# Altium PCB P00160.5_868_P.PcbDoc
Units mm, origin at the board's own origin, x right, y up, seen from the top; angles counter-clockwise.
Board outline 67 x 20.5 mm, 4 copper layers (Top Layer, MID1, MID2, Bottom Layer), stack 0.982 mm thick; 71 components, 48 nets, 315 pads, 246 vias.
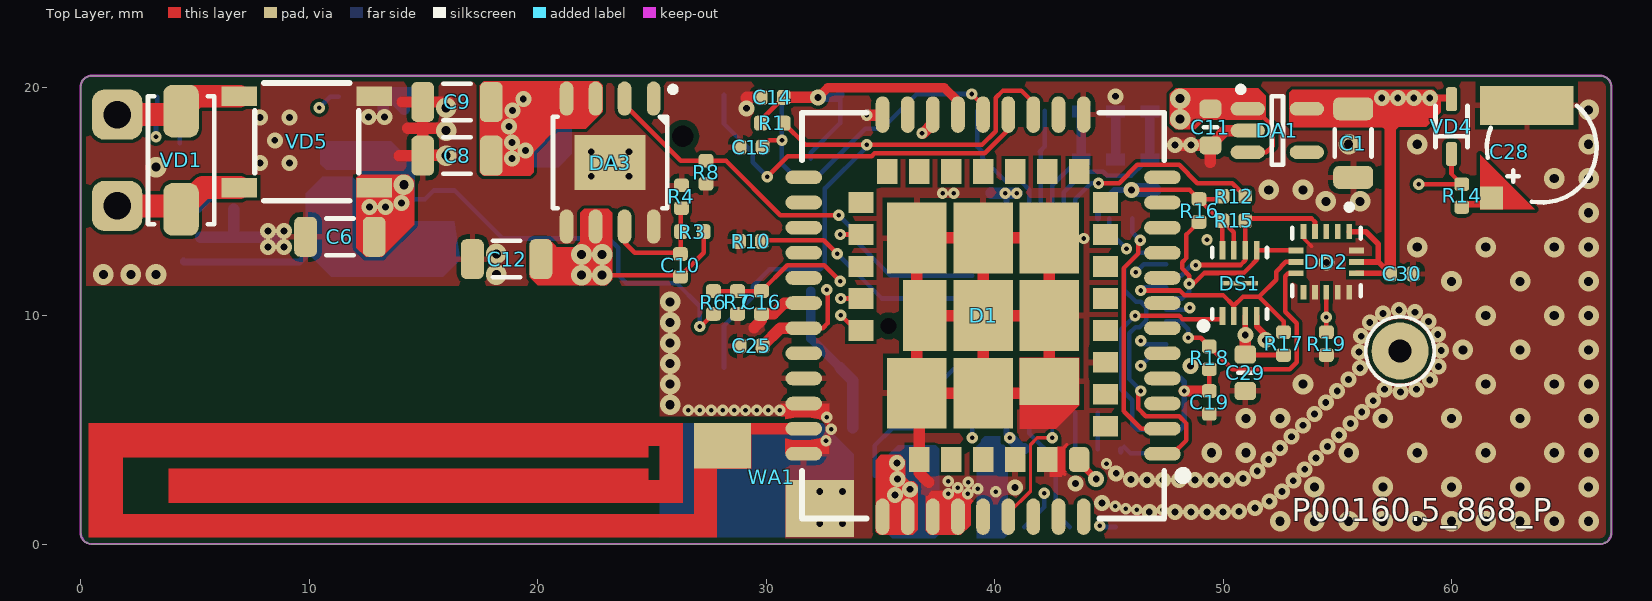
[diagram p0: Top Layer view]
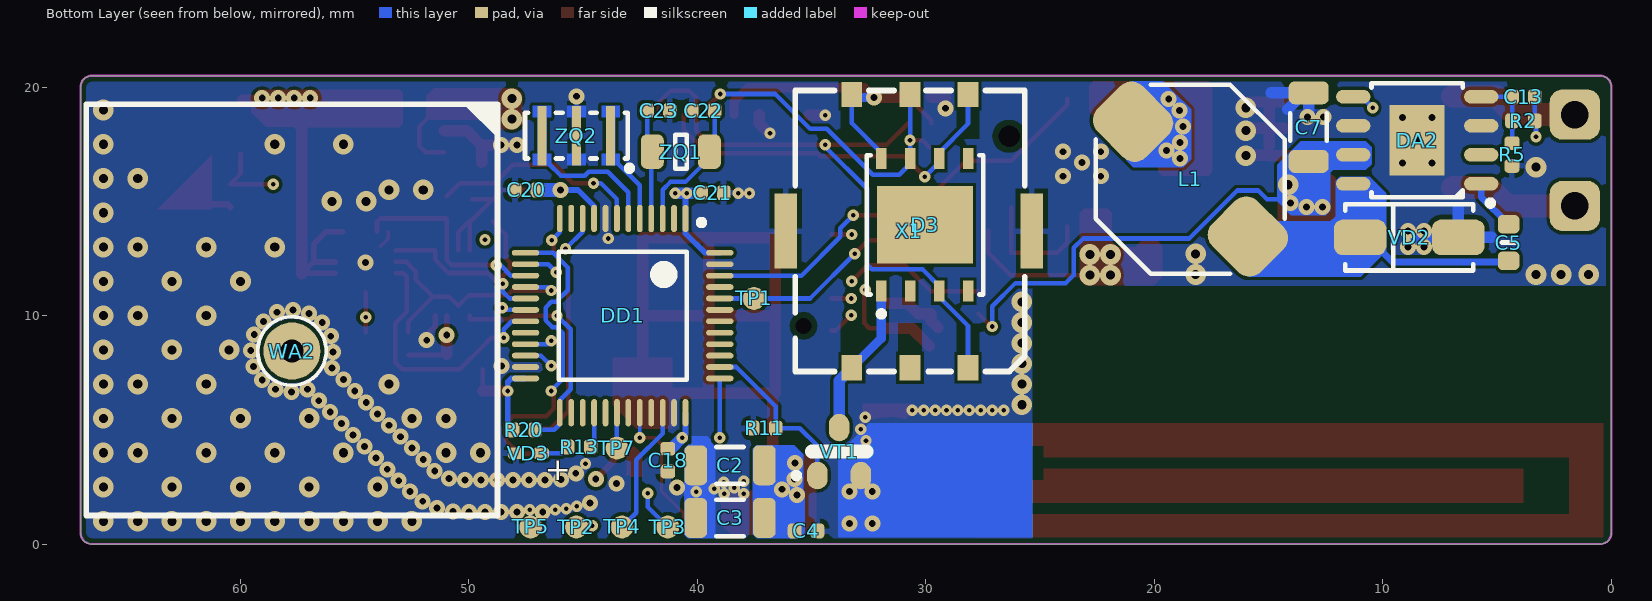
[diagram p1: Bottom Layer view, seen from below]
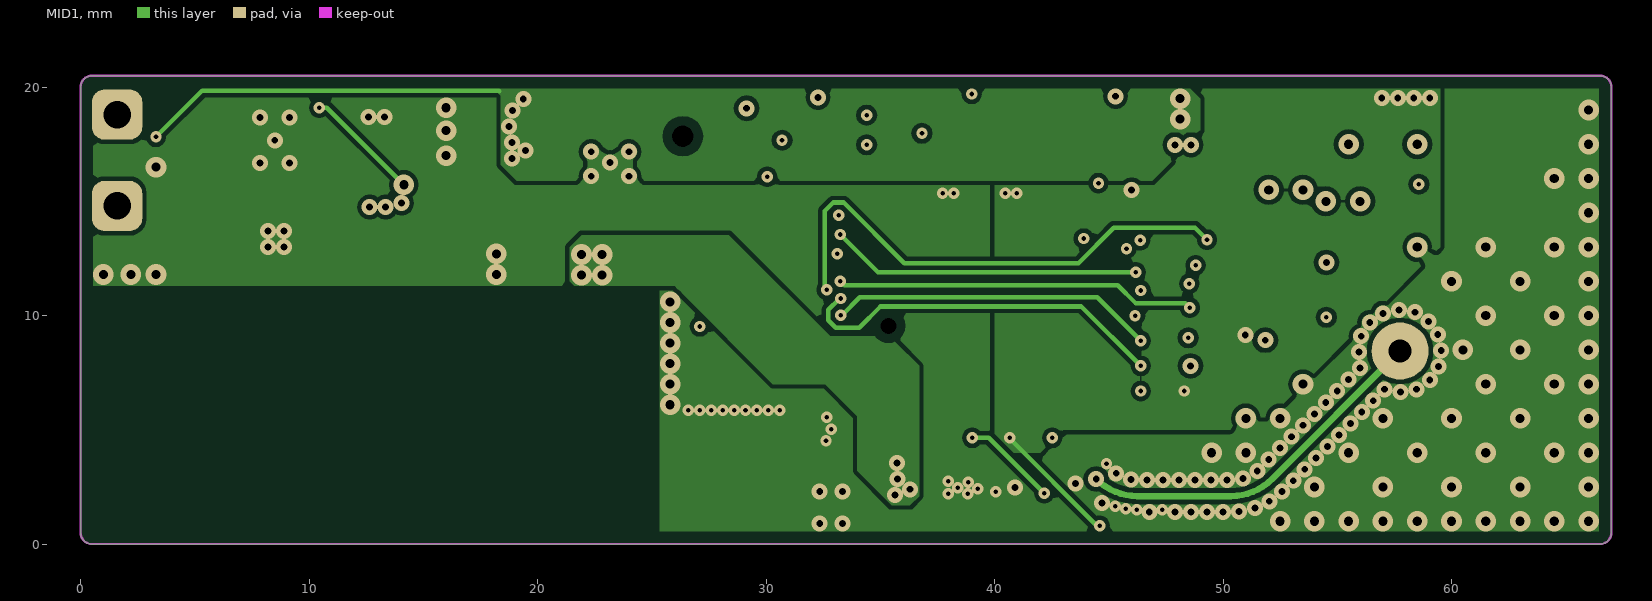
[diagram p2: MID1]
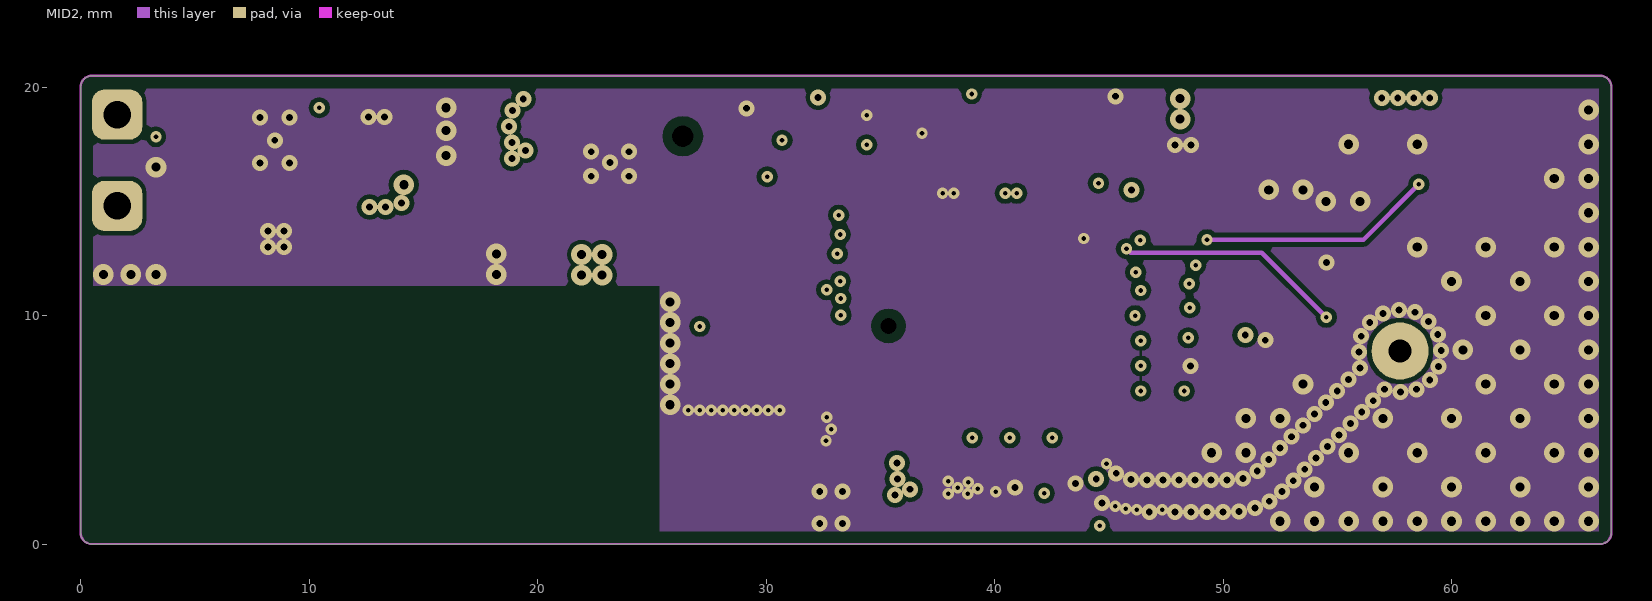
[diagram p3: MID2]
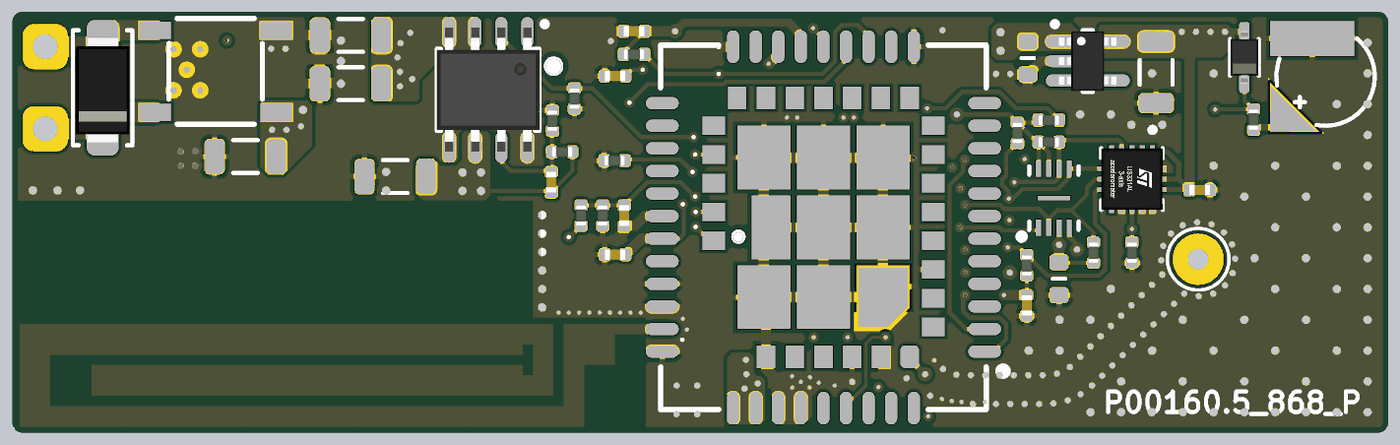
[diagram p4: 3D render of the assembled board from above, using the file's embedded part models]
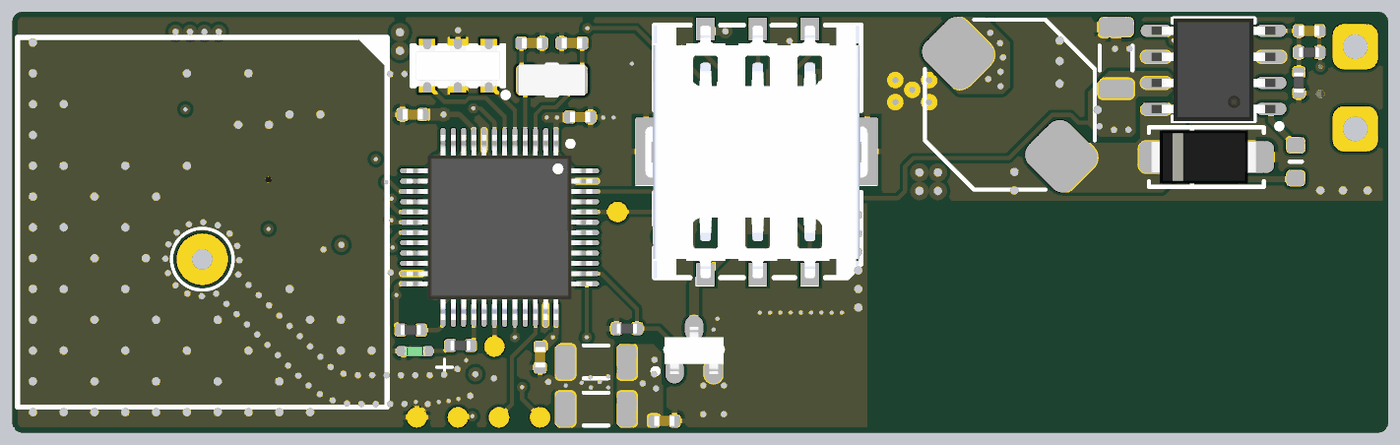
[diagram p5: 3D render of the assembled board from below, using the file's embedded part models]

## Layer stack, top to bottom
Top Solder: solder mask 0.02, Solder Resist, Dk 3.5
Top Layer: signal copper 0.018
Dielectric 1: prepreg 0.2, Prepreg 7628, Dk 4.6
MID1: signal copper 0.018
Dielectric 3: core 0.51, Dk 4.2
MID2: signal copper 0.018
Dielectric 2: prepreg 0.2, Prepreg 7628, Dk 4.2
Bottom Layer: signal copper 0.018
Bottom Solder: solder mask 0.02, Solder Resist, Dk 3.5

## Board outline
0,0.5 0,20 cw(c0.5,20) 0.5,20.5 66.5,20.5 cw(c66.5,20) 67,20 67,0.5 cw(c66.5,0.5) 66.5,0 0.5,0 cw(c0.5,0.5)

## Design rules (kind name [scope] priority, off if disabled: settings)
Clearance NonPlated_MID [(ObjectKind = 'Pad') And (Net = 'No Net') vs IsElectrical  And OnMid] p1: gap=0.4
Clearance Non_plated [(ObjectKind = 'Pad') And (Net = 'No Net')  And HasRoundHole vs IsElectrical  And (OnTOP Or OnBottom)] p2: gap=0.25
Clearance KeepOut_MID [(IsKeepOut And (Layer = 'KeepOutLayer')) vs (IsElectrical and OnMid) or IsVia] p3: gap=0.5
Clearance KeepOut [IsKeepOut] p4: gap=0.2
Clearance Top&Bot [OnTop Or OnBottom] p5: gap=0.15
Clearance All [All] p6: gap=0.2
ComponentClearance [All] p1 off: gap=0.1 collisioncheckmode=3 verticalgap=0.1 showdistances=FALSE
PlaneConnect [All] p1: planeconnectstyle=Direct reliefexpansion=0.508 reliefentries=4 reliefconductorwidth=0.254 reliefairgap=0.254
PolygonConnect Direct [(Component = 'DD1') Or (Component = 'DA2') Or (Component = 'VD5')   Or (Component = 'DA3')Or (Component = 'WA1')   Or (Component = 'DD2')] p1: connectstyle=Direct reliefconductorwidth=0.254 reliefentries=4 polygonreliefangle="90 Angle" airgapwidth=0.254
PolygonConnect GND_VIAS [InNet('GND') or InNet('4V0') or InNet('3V3MCU')  or InNet('4V5') vs IsVia] p2: connectstyle=Direct reliefconductorwidth=0.254 reliefentries=4 polygonreliefangle="90 Angle" airgapwidth=0.254
PolygonConnect [All] p3: connectstyle=Relief reliefconductorwidth=0.25 reliefentries=4 polygonreliefangle="90 Angle" airgapwidth=0.2
RoutingVias [All] p1: holewidth=0.3 width=0.3 viastyle="Through Hole" minholewidth=0.2 minwidth=0.5 maxholewidth=1 maxwidth=2
SolderMaskExpansion [All] p1: expansion=0.05
Width RF [InNetClass('RF')] p1 off: maxlimit=1.091 minlimit=0.254 preferedwidth=1.091 toplayer_minwidth=0.283 toplayer_maxwidth=0.283 toplayer_prefwidth=0.283 midlayer1_minwidth=0.758 midlayer1_maxwidth=0.758 midlayer1_prefwidth=0.758 midlayer2_maxwidth=0.254 midlayer2_prefwidth=0.254 bottomlayer_minwidth=1.091 impedancedriven=TRUE minimp=50.000000 maximp=50.000000 favimp=50.000000
Width All_Width [All] p2: maxlimit=2 minlimit=0.15 preferedwidth=0.2 minimp=50.000000 maximp=50.000000 favimp=50.000000
28 further rules are at their usual default settings.

## Classes and differential pairs
net class RF: GPS_ANT GSM_ANT

## Components (designator, comment, footprint, x,y, rotation, side; value= is the part's Value field where it differs from the comment)
C1 "чип 1206 100uF/6.3V," CAPC3216X135(1206) 55.7,17.55 r270 top
C2 "чип 1206 100uF/6.3V," CAPC3216X135(1206) 38.575,3.45 r0 bottom
C3 "чип 1206 100uF/6.3V," CAPC3216X135(1206) 38.575,1.15 r0 bottom
C4 "чип 0402 0.1uF/10V," CAPC1005X50(0402) 35.25,0.575 r0 bottom
C5 "чип 0603 0.1uF/50V," CAPC1608X50(0603) 4.5,13.2 r90 bottom
C6 "чип 1206 10uF/50V," CAPC3216X135(1206) 11.35,13.45 r180 top
C7 "чип 1206 10uF/50V," CAPC3216X135(1206) 13.25,18.25 r90 bottom locked
C8 "чип 1206 100uF/6.3V," CAPC3216X135(1206) 16.475,17 r180 top
C9 "чип 1206 100uF/6.3V," CAPC3216X135(1206) 16.475,19.35 r180 top
C10 "чип 0402 */," CAPC1005X50(0402) 26.25,12.2 r90 top
C11 "чип 0603 10uF/6.3V," CAPC1608X50(0603) 49.45,18.25 r90 top (schematic designator C?)
C12 "чип 1206 100uF/6.3V," CAPC3216X135(1206) 18.65,12.475 r180 top
C13 "чип 0402 150pF/50V," CAPC1005X50(0402) 3.85,19.575 r0 bottom
C14 "чип 0402 0.1uF/10V," CAPC1005X50(0402) 30.275,19.55 r0 top
C15 "чип 0402 10nF/10V," CAPC1005X50(0402) 29.35,17.375 r0 top
C16 "чип 0402 0.1uF/10V," CAPC1005X50(0402) 29.8,10.575 r90 top
C18 "чип 0402 0.1uF/10V," CAPC1005X50(0402) 41.3,3.675 r90 bottom
C19 "чип 0402 0.1uF/10V," CAPC1005X50(0402) 49.4,6.2 r90 top
C20 "чип 0402 0.1uF/10V," CAPC1005X50(0402) 47.5,15.5 r180 bottom
C21 "чип 0402 0.1uF/10V," CAPC1005X50(0402) 39.35,15.375 r0 bottom
C22 "чип 0402 10pF/10V," CAPC1005X50(0402) 39.75,18.975 r0 bottom
C23 "чип 0402 10pF/10V," CAPC1005X50(0402) 41.7,18.975 r180 bottom
C25 "чип 0402 0.1uF/10V," CAPC1005X50(0402) 29.35,8.675 r0 top
C28 "Coin 80mF/3.3В" XH414HG-IV01E 63.95,17.35 r180 top
C29 "чип 0603 10uF/6.3V," CAPC1608X50(0603) 50.975,7.5 r90 top
C30 "чип 0402 0.1uF/10V," CAPC1005X50(0402) 57.825,11.825 r180 top
D1 "SIM868" SIM868 39.5,10 r180 top locked
D3 "SIMCHIP" VQFN127P600-8N 30.05,13.975 r90 bottom locked
DA1 "TPS76333DBV(SOT23-5)" SOT95P285X130-5N(SOT23-5) 52.375,18.1 r0 top
DA2 "ST1S14PHR(HSOP-8)" HSOP127P-8N 8.5,17.675 r0 bottom locked
DA3 "RT9025-18GSP(HSOP-8)" HSOP127P-8N 23.175,16.7 r270 top locked
DD1 "STM32L151CBT6(LQFP-48)" TSQFP50P900X900X160-48N 43.275,10 r270 bottom locked
DD2 "LIS331DLH(LGA-16 (3x5x1))" LGA16S50P3X5_300X300X100 54.525,12.35 r270 top
DS1 "MX25L1006EZUI-10G(USON-8)" SON50P300X60_HS-9N 50.725,11.425 r90 top locked
L1 "CDRH8D28NP-100NC(10uH)" CDRH8D28NP 18.425,15.975 r45 bottom locked
R1 "чип 0402 4.75k 1%" RESC1005X35(0402) 30.275,18.425 r0 top
R2 "чип 0402 6.8k 1%" RESC1005X35(0402) 3.85,18.525 r180 bottom
R3 "чип 0402 19.1k 1%" RESC1005X35(0402) 26.775,13.675 r0 top
R4 "чип 0402 4.75k 1%" RESC1005X35(0402) 26.3,15.2 r90 top
R5 "чип 0402 2.49k 1%" RESC1005X35(0402) 4.35,17.05 r270 bottom
R6 "чип 0402 102k 1%" RESC1005X35(0402) 27.7,10.575 r90 top
R7 "чип 0402 6.8k 1%" RESC1005X35(0402) 28.75,10.575 r270 top
R8 "чип 0402 102k 1%" RESC1005X35(0402) 27.375,16.275 r90 top
R10 "чип 0402 10k 5%" RESC1005X35(0402) 29.325,13.25 r0 top
R11 "чип 0402 102k 1%" RESC1005X35(0402) 37.075,5.075 r0 bottom
R12 "чип 0402 10k 5%" RESC1005X35(0402) 50.475,15.225 r0 top
R13 "чип 0402 1k 5%" RESC1005X35(0402) 45.175,4.25 r0 bottom
R14 "чип 0402 10R 5%" RESC1005X35(0402) 60.45,15.25 r90 top
R15 "чип 0402 19.1k 1%" RESC1005X35(0402) 50.475,14.15 r180 top
R16 "чип 0402 19.1k 1%" RESC1005X35(0402) 48.95,14.6 r90 top
R17 "чип 0402 19.1k 1%" RESC1005X35(0402) 52.65,8.775 r270 top
R18 "чип 0402 19.1k 1%" RESC1005X35(0402) 49.4,8.15 r270 top
R19 "чип 0402 10k 5%" RESC1005X35(0402) 54.525,8.775 r270 top
R20 "чип 0402 10k 5%" RESC1005X35(0402) 47.6,5 r0 bottom
TP1 "BOOT0" TEST_POINT 37.525,10.75 r90 bottom
TP2 "3V3" TEST_POINT 45.3,0.75 r90 bottom
TP3 "SWCLK" TEST_POINT 41.3,0.75 r90 bottom
TP4 "SWDIO" TEST_POINT 43.3,0.75 r90 bottom
TP5 "GND" TEST_POINT 47.3,0.75 r90 bottom
TP7 "UART1_TX" TEST_POINT 43.525,4.2 r90 bottom
VD1 "SMAJ48CA (SMA)" "DIOM5226X267N (SMA) B" 4.4,16.8 r90 top locked
VD2 "B340A (SMA)" "DIOM5226X267N (SMA)" 8.85,13.425 r180 bottom locked
VD3 "APHHS1005SURCK (чип 0402)" LED1005X50N(0402)_GREEN 47.4,3.975 r180 bottom locked
VD4 "BAT54WS (SOD323)" SOD2514X110N(SOD323) 60,18.275 r90 top
VD5 "MDB6S (MicroDIP)" Micro-DIP 9.9,17.6 r180 top locked
VT1 "IRLML0030TRPBF (SOT-23)" "SOT95P230-3N (SOT-23) num" 33.8,4.05 r90 bottom locked
WA1 "" PCB_ANT 27.85,0.3 r90 top locked
WA2 "UDA182-180-1575-C-GPS-GLONASS-PCB" UDA184 57.75,10.25 r180 bottom locked
X1 "MUP Connectors MUP-C781" MUP-C781 30.7,13.7 r0 bottom locked
ZQ1 "DST310S(32.768 KHz)" XTAL320X150X90-2N(DST) 40.725,17.175 r0 bottom
ZQ2 "CSTCR4M00G15C99-R0(4 MHz)" "XTAL450X200X120 (CSTCR)" 45.3,17.875 r0 bottom

## Footprints (in the part's own frame and the unit in brackets; to place one, negate y for a bottom-side part, rotate by r counter-clockwise, add the part's x,y. Pads: shape width x height; smd on the part's side, far side on the other; paste and mask are expansions set on the pad)
CAPC1005X50(0402) [mm]
  rrect50% 0.6x0.65 smd paste-0.025: 1(-0.5,0) 2(0.5,0)
  body extent -0.5,-0.25 0.5,0.25, height 0.6
CAPC1608X50(0603) [mm]
  rrect50% 0.8x0.95 smd paste-0.025: 1(-0.8,0) 2(0.8,0)
  silkscreen extent 0,-0.3 0,0.3, body extent -0.8,-0.4 0.8,0.4, height 0.5
CAPC3216X135(1206) [mm]
  rrect50% 1x1.75 smd paste-0.025: 1(-1.5,0) 2(1.5,0)
  silkscreen extent -0.6,-0.8 0.6,0.8, body extent -1.6,-0.8 1.6,0.8, height 1.35
CDRH8D28NP [mm] "CDRH8D28NP"
  rrect50% 3x2.8 smd: 1(-3.55,0) 2(3.55,0)
  silkscreen extent -4.15,-4.15 4.15,4.15, body extent -4.12,-4.15 4.18,4.15, height 2.8
"DIOM5226X267N (SMA)" [mm]
  rrect50% 2.3x1.55 smd: A(2.15,0) C(-2.15,0)
  silkscreen extent -2.8,-1.45 2.8,1.45, body extent -2.73,-1.3 2.47,1.3, height 2.4
"DIOM5226X267N (SMA) B" [mm] "for Bidirectional"
  rrect50% 2.3x1.55 smd: 1(-2.15,0) 2(2.15,0)
  silkscreen extent -2.8,-1.45 2.8,1.45, body extent -2.73,-1.3 2.47,1.3, height 2.4
HSOP127P-8N [mm] "HSOP 1.27 mm pitch. 8 leads. Body 4x5mm. Exposed Pad."
  oval 1.5x0.6 smd: 1(-2.8,1.905) 2(-2.8,0.635) 3(-2.8,-0.635) 4(-2.8,-1.905) 5(2.8,-1.905) 6(2.8,-0.635) 7(2.8,0.635) 8(2.8,1.905)
  rect 2.41x3.1 smd: 9(0,0)
  silkscreen extent -3.32,-2.5 2,2.87, body extent -3.02,-2.51 3.02,2.51, height 1.63
LED1005X50N(0402)_GREEN [mm]
  rrect60% 0.7x0.5 smd: A(0.55,0) C(-0.55,0)
  body extent -0.5,-0.25 0.51,0.25, height 0.45
LGA16S50P3X5_300X300X100 [mm] "LGA, 16-Leads, Body 3.0x3.0mm (max), Pitch 0.50mm, IPC Medium Density"
  rect 0.65x0.25 smd: 1(-1.325,1) 2(-1.325,0.5) 3(-1.325,0) 4(-1.325,-0.5) 5(-1.325,-1) 9(1.325,-1) 10(1.325,-0.5) 11(1.325,0) 12(1.325,0.5) 13(1.325,1)
  rect 0.25x0.65 smd: 6(-0.5,-1.325) 7(0,-1.325) 8(0.5,-1.325) 14(0.5,1.325) 15(0,1.325) 16(-0.5,1.325)
  silkscreen extent -2.52,-1.5 1.5,1.5, body extent -1.5,-1.5 1.5,1.5, height 1.01
Micro-DIP [mm]
  rect 1.55x0.85 smd: 1(-2.95,2) 2(-2.95,-2) 3(2.95,-2) 4(2.95,2)
  silkscreen extent -2.27,-2.58 2.27,2.58
MUP-C781 [mm]
  rect 0.9x1.1 smd: 1(2.54,-5.97) 2(0,-5.97) 3(-2.54,-5.97) 5(2.54,5.98) 6(0,5.98) 7(-2.54,5.98)
  rect 1x3.29 smd: 4(5.44,0) 8(-5.33,0)
  round 0 hole 0.95 unplated mask+0.5: MH1(-4.34,-4.15)
  round 0 hole 0.7 unplated mask+0.4: MH2(4.66,4.15)
  silkscreen extent -5.02,-6.15 5.02,6.15, body extent -5.84,-6.52 5.96,6.57, height 1.36
PCB_ANT [mm]
  rect 2x2.5 smd paste-100 mask-100: 1(4,-0.25)
  rect 2.5x3 smd paste-100 mask-100: 2(1.25,-4.5)
  Top Layer region: 0,0 0,27.5 5,27.5 5,1.5 1.5,1.5 1.5,24 3,24 3,3 2.5,3 2.5,2.5 4,2.5 4,3 3.5,3 3.5,26 1,26 1,1 5,1 5,-1.5 3,-1.5 3,0
  Bottom Layer region: 5,-4.625 5,2.5 0,2.5 0,-6 3.625,-6
RESC1005X35(0402) [mm]
  rrect50% 0.6x0.65 smd paste-0.025: 1(-0.5,0) 2(0.5,0)
  body extent -0.5,-0.25 0.5,0.25, height 0.38
SIM868 [mm]
  oval 1.6x0.6 smd: 1(-7.85,6.05) 2(-7.85,4.95) 3(-7.85,3.85) 4(-7.85,2.75) 5(-7.85,1.65) 6(-7.85,0.55) 7(-7.85,-0.55) 8(-7.85,-1.65) 9(-7.85,-2.75) 10(-7.85,-3.85) 11(-7.85,-4.95) 12(-7.85,-6.05) 22(7.85,-6.05) 23(7.85,-4.95) 24(7.85,-3.85) 25(7.85,-2.75) 26(7.85,-1.65) 27(7.85,-0.55) 28(7.85,0.55) 29(7.85,1.65) 30(7.85,2.75) 31(7.85,3.85) 32(7.85,4.95) 33(7.85,6.05)
  oval 0.6x1.6 smd: 13(-4.4,-8.8) 14(-3.3,-8.8) 15(-2.2,-8.8) 16(-1.1,-8.8) 17(0,-8.8) 18(1.1,-8.8) 19(2.2,-8.8) 20(3.3,-8.8) 21(4.4,-8.8) 34(4.4,8.8) 35(3.3,8.8) 36(2.2,8.8) 37(1.1,8.8) 38(0,8.8) 39(-1.1,8.8) 40(-2.2,8.8) 41(-3.3,8.8) 42(-4.4,8.8)
  rect 1.1x0.9 smd: 43(-5.35,4.85) 44(-5.35,3.45) 45(-5.35,2.05) 46(-5.35,0.65) 47(-5.35,-0.75) 48(-5.35,-2.15) 49(-5.35,-3.55) 50(-5.35,-4.95) 58(5.35,-4.95) 59(5.35,-3.55) 60(5.35,-2.15) 61(5.35,-0.75) 62(5.35,0.65)
  rect 0.9x1.1 smd: 51(-4.2,-6.3) 52(-2.8,-6.3) 53(-1.4,-6.3) 54(0,-6.3) 55(1.4,-6.3) 56(2.8,-6.3) 57(4.2,-6.3) 63(2.8,6.3) 64(1.4,6.3) 65(0,6.3) 66(-1.4,6.3) 67(-2.8,6.3)
  rrect50% 0.9x1.1 smd: 68(-4.2,6.3)
  rect 2.6x2.07 smd paste-5 mask-3: 69(-2.9,2.885)
  rect 2.6x3.1 smd: 70(-2.9,0) 71(-2.9,-3.4) 72(0,-3.4) 73(2.9,-3.4) 75(2.9,3.4) 76(0,3.4) 77(0,0)
  rect 1.9x3.1 smd: 74(2.55,0)
  Top Layer region: -4.2,1.85 -4.2,3.92 -3.17,4.95 -1.6,4.95 -1.6,1.85
  silkscreen extent -8.87,-8.87 7.93,8.87, body extent -7.93,-8.87 7.93,8.87, height 2.61
SOD2514X110N(SOD323) [mm]
  rrect50% 1.05x0.5 smd: A(1.2,0) C(-1.2,0)
  silkscreen extent -0.9,-0.7 0.9,0.7, body extent -1.3,-0.67 1.3,0.68, height 1.1
SON50P300X60_HS-9N [mm] "SON, 8-Leads, Body 2.00x3.00mm, Pitch 0.50mm, Thermal Pad 1.60x0.20mm, IPC Medium Density"
  rect 0.8x0.25 smd: 1(-1.44,0.75) 2(-1.44,0.25) 3(-1.44,-0.25) 4(-1.44,-0.75) 5(1.44,-0.75) 6(1.44,-0.25) 7(1.44,0.25) 8(1.44,0.75)
  rect 0.2x1.6 smd: 9(0,0)
  silkscreen extent -2.02,-1.2 1.55,1.72, body extent -1.55,-1.05 1.55,1.05, height 0.6
"SOT95P230-3N (SOT-23) num" [mm]
  oval 1.2x0.9 smd: 1(-1.05,0.95) 2(-1.05,-0.95) 3(1.05,0)
  silkscreen extent -1.17,-1.2 0,2, body extent -1.2,-1.45 1.1,1.45, height 1
SOT95P285X130-5N(SOT23-5) [mm]
  oval 1.5x0.6 smd: 1(-1.295,0.95) 2(-1.295,0) 3(-1.295,-0.95) 4(1.295,-0.95) 5(1.295,0.95)
  silkscreen extent -1.72,-1.5 0.25,1.92, body extent -1.4,-1.45 1.4,1.45, height 1.45
TEST_POINT [mm]
  round 1 smd paste-1: 1(0,0)
TSQFP50P900X900X160-48N [mm] "TSQFP, 48-Leads, Body 9.2x9.2mm (max), Pitch 0.50mm, IPC Medium Density"
  oval 1.2x0.25 smd: 1(-4.25,2.75) 2(-4.25,2.25) 3(-4.25,1.75) 4(-4.25,1.25) 5(-4.25,0.75) 6(-4.25,0.25) 7(-4.25,-0.25) 8(-4.25,-0.75) 9(-4.25,-1.25) 10(-4.25,-1.75) 11(-4.25,-2.25) 12(-4.25,-2.75) 25(4.25,-2.75) 26(4.25,-2.25) 27(4.25,-1.75) 28(4.25,-1.25) 29(4.25,-0.75) 30(4.25,-0.25) 31(4.25,0.25) 32(4.25,0.75) 33(4.25,1.25) 34(4.25,1.75) 35(4.25,2.25) 36(4.25,2.75)
  oval 0.25x1.2 smd: 13(-2.75,-4.25) 14(-2.25,-4.25) 15(-1.75,-4.25) 16(-1.25,-4.25) 17(-0.75,-4.25) 18(-0.25,-4.25) 19(0.25,-4.25) 20(0.75,-4.25) 21(1.25,-4.25) 22(1.75,-4.25) 23(2.25,-4.25) 24(2.75,-4.25) 37(2.75,4.25) 38(2.25,4.25) 39(1.75,4.25) 40(1.25,4.25) 41(0.75,4.25) 42(0.25,4.25) 43(-0.25,4.25) 44(-0.75,4.25) 45(-1.25,4.25) 46(-1.75,4.25) 47(-2.25,4.25) 48(-2.75,4.25)
  silkscreen extent -4.2,-2.8 2.8,3.57, body extent -4.51,-4.51 4.51,4.51, height 1.75
UDA184 [mm] "GPS Ceramic Patch Antenna CiROSTAR® Series 18x18x4mm"
  round 2.5 hole 1: 1(0,-1.8)
  silkscreen extent -9,-9 9,9, body extent -9,-9 9,9, height 4.17
VQFN127P600-8N [mm]
  rect 0.925x0.45 smd: 1(-2.9,1.905) 2(-2.9,0.635) 3(-2.9,-0.635) 4(-2.9,-1.905) 5(2.9,-1.905) 6(2.9,-0.635) 7(2.9,0.635) 8(2.9,1.905)
  rect 3.4x4.2 smd: 9(0,0)
  silkscreen extent -4.02,-2.55 3.05,2.55, body extent -3.05,-2.55 3.05,2.55, height 0.9
XH414HG-IV01E [mm]
  rect 1x1 smd: 1(2.2,2.2)
  rect 4.1x1.7 smd: 2(0.65,-1.85)
  Top Layer region: 2.7,2.7 2.7,0.3 0.3,2.7
  silkscreen extent -2.4,-1.84 2.4,2.4, body extent -2.4,-2.4 2.4,2.4, height 1.8
XTAL320X150X90-2N(DST) [mm]
  rrect50% 1x1.5 smd paste-0.025 mask+0.1: 1(-1.25,0) 2(1.25,0)
  silkscreen extent -0.25,-0.75 0.25,0.75, body extent -1.6,-0.75 1.6,0.75, height 0.9
"XTAL450X200X120 (CSTCR)" [mm] "Ceramic Resonators CSTCR_G15C"
  rect 0.4x2.6 smd: 1(-1.5,0) 2(0,0) 3(1.5,0)
  Top Layer region: -1.9,1.3 -1.9,0.8 -1.7,0.8 -1.7,-0.8 -1.9,-0.8 -1.9,-1.3 -1.1,-1.3 -1.1,-0.8 -1.3,-0.8 -1.3,0.8 -1.1,0.8 -1.1,1.3
  Top Layer region: -0.4,1.3 -0.4,0.8 -0.2,0.8 -0.2,-0.8 -0.4,-0.8 -0.4,-1.3 0.4,-1.3 0.4,-0.8 0.2,-0.8 0.2,0.8 0.4,0.8 0.4,1.3
  Top Layer region: 1.1,1.3 1.1,0.8 1.3,0.8 1.3,-0.8 1.1,-0.8 1.1,-1.3 1.9,-1.3 1.9,-0.8 1.7,-0.8 1.7,0.8 1.9,0.8 1.9,1.3
  silkscreen extent -2.37,-1 2.25,1.47, body extent -2.25,-1 2.25,1, height 1.15

## Part data
C1 C2 C3 C6 C7 C8 C9 C12: library part C1206, "C1206"
C4 C10 C13 C14 C15 C16 C18 C19 C20 C21 C22 C23 C25 C30: library part C0402, "C0402"
C5 C11 C29: library part C0603, "C0603"
C28: library part XH414HG-IV01E, "ELECTRIC DOUBLE LAYER CAPACITORS"
DA1: library part TPS76333DBV, "TPS76333DBV"
DA2: library part ST1S14
DA3: library part RT9025, "2A, Ultra Low Dropout LDO"
DD1: library part STM32L151CxU6, "STM32L151CxU6"
DD2: library part LIS331DLH, "MEMS digital output motion sensor  ultra low-power high performance 3-axes “nano” accelerometer"
DS1: library part MX25L1006E, "1M-BIT [x 1/x 2] CMOS SERIAL FLASH"
L1: library part CDRH8D28NP, "CDRH8D28NP"
R1 R2 R3 R4 R5 R6 R7 R8 R10 R11 R12 R13 R14 R15 R16 R17 R18 R19 R20: library part R0402, "R0402"
TP1 TP2 TP3 TP4 TP5 TP7: library part TEST_POINT, "TEST_POINT"
VD1: library part "SMA Zener (Bidir)", "Zener (TVS) Diode in SMA package Bidirectional"
VD2: library part "SMA SCHOTTKY", "Schottky diode in SMA Case"
VD3: library part "LED 0402", "LED 0402"
VD4: library part BAT54WS, "BAT54WS"
VD5: library part MDB6S, "B1S-B10S 0.5 surface mount glass passivated bridge rectifier"
VT1: library part IRLML0030, "HEXFET Power MOSFET"
WA1: library part ANT_PCB_CLIP, "CLIP_ANT"
WA2: library part "GPS antenna Pass", "A25, UDA25, A18"
X1: library part "SIM MUP-C781", "Sim Holder MUP-C781"
ZQ1: library part "XTAL, SMD, 3.2mm x 1.5mm, 2 pads", "DST310S"
ZQ2: library part "XTAL, SMD, 4.5mm x 2mm, 3 pads", "CSTCR_G15C Ceramic Resonators"

## Free pads (board coordinates)
  rrect50% 2.2x2.2 hole 1.2: 0(1.6,14.8) 0(1.6,18.8)

## Via types
v1: diameter 0.7, hole 0.3, Top Layer to Bottom Layer, tented both sides, 91 vias
v2: diameter 0.9, hole 0.4, Top Layer to Bottom Layer, tented both sides, 78 vias
v3: diameter 0.5, hole 0.2, Top Layer to Bottom Layer, tented both sides, 67 vias
v4: diameter 0.7, hole 0.3, Top Layer to Bottom Layer, 10 vias

## Nets (pads, with @x,y where several pads share a name; then routed paths per layer and width w, separated by ;. In a path a pad name is that pad's centre, name@x,y a point inside that pad or via, vN(x,y) a via of type N, cw(c..) or ccw(c..) an arc to the next point about the centre after c; other vN are vias at no path point)
3V3MCU: C1.1 C18.2 C19.2 C20.2 C21.2 C29.2 C30.2 DA1.5 DD1.1 DD1.9 DD1.24 DD1.36 DD1.48 DD2.1 DD2.14 DD2.15 DS1.3 DS1.7 DS1.8 R12.1 R15.2 R16.2 R17.2 R18.2 R20.2 TP2.1 VD4.A | length 45.9
  Top Layer w0.2: v1(46,15.5) 48.55,15.5 R16.2 ; C19.2 R18.2 ; R12.1@49.85,15.1 R16.2 ; DS1.8 R15.2 ; DS1.7 50.475,13.65 R15.2 ; C29.2 51,8.275 R17.2 ; R16.2 49.9,14.15 R15.2
  Top Layer w0.25: v1(50.975,9.15) DS1.3 ; DD2.1 56.25,13.675 56.8,13.125 56.8,12.35 ; DD2.14 C30.2@57.3,11.85 ; DD2.15 56.8,12.35 ; C30.2 C30.2@57.3,11.85 ; 56.8,12.35 C30.2@57.3,11.85
  Top Layer w0.3: v1(59.05,19.525) 59.95,19.525 VD4.A
  Top Layer w0.5: v3(48.3,6.7) C19.2 ; C29.2 v1(50.975,9.15) ; C30.2 57.325,18.575
  MID1 w0.2: v3(40.675,4.65) 40.675,4.606 v3@44.431,0.85
  Bottom Layer w0.2: v3(44.6,0.8) 44.65,0.75 TP2.1
  Bottom Layer w0.25: DD1.48 39.675,12.75 40.525,13.6 DD1.1 40.525,15.3 v3(40.475,15.35) ; DD1.36 40.525,4.8 v3(40.675,4.65) ; DD1.9 44.525,14.791 45.234,15.5 v1(46,15.5) ; DD1.24 48.15,7.25 48.3,7.1 v3(48.3,6.7) 48.3,5.2 R20.2
  Bottom Layer w0.5: C21.2 39.85,15.35 v3(40.475,15.35) v3(40.975,15.35) ; v3(40.675,4.65) 41.15,4.175 C18.2
  Bottom Layer w0.6: v1(46,15.5) C20.2
  other v1: 56.95,19.525 57.65,19.525 58.35,19.525
4V0: C2.1 C3.1 C4.2 C10.1 C12.1 D1.34 D1.35 DA3.6 R3.2 | length 5.8
  Top Layer w0.2: v2(22.825,11.775) 26.25,11.775 26.275,11.75 27.275,12.75 R3.2@27.275,13.725
  other v1: 35.65,2.15 36.3,2.4 35.75,2.85 35.725,3.55
  other v2: 21.925,11.775 21.925,12.675 22.825,12.675
4V5: C8.1 C9.1 C11.2 C13.1 DA1.1 DA1.3 DA3.3 DA3.4 L1.2 R2.2 | length 20.4
  Top Layer w0.2: DA1.3 51.9,17.15 52.175,17.425 52.175,18.275 DA1.1@51.65,18.8
  MID1 w0.2: v3(3.3,17.825) 5.325,19.85 18.3,19.85 18.325,19.825
  Bottom Layer w0.2: v3(3.3,17.825) 3.3,18.475 R2.2 C13.1
  other v1: 18.875,16.875 19.475,17.225 18.875,17.575 18.75,18.275 18.9,18.975 19.375,19.475
  other v2: 48.125,18.6 48.125,19.5
AC_CS: DD1.19 DD2.8 R18.1 | length 11.4
  Top Layer w0.2: v3(48.475,9.025) 49.025,9.025 R18.1 50.4,7.65 52.916,7.65 53.225,7.959 53.225,9.67 52.725,10.17 52.725,11.725 52.85,11.85 DD2.8
  Bottom Layer w0.2: DD1.19 48.125,9.75 48.475,9.4 v3(48.475,9.025)
AC_INT: DD1.10 DD2.11 R19.1 | length 13.4
  Top Layer w0.2: R19.1 v3(54.525,9.925) DD2.11
  MID2 w0.2: v3(45.775,12.925) 45.95,12.75 51.7,12.75 v3(54.525,9.925)
  Bottom Layer w0.2: DD1.10 45.025,13.675 v3(45.775,12.925)
BOOT0: DD1.44 R10.2 TP1.1 | length 10.3
  Top Layer w0.2: R10.2 29.825,13.3 32.525,13.3 v3(33.125,12.7)
  Bottom Layer w0.2: v3(33.125,12.7) 35.075,10.75 DD1.44
BOOT1: DD1.20
FLASH_CS: DD1.25 DS1.1 R20.1 | length 10.4
  Top Layer w0.2: v3(46.15,10) 48.078,10 48.228,9.85 49.975,9.85 DS1.1
  Bottom Layer w0.2: v3(46.15,10) 45.55,9.4 45.55,6.775 46.025,6.3 DD1.25 46.025,5.25 46.275,5 R20.1
GND: C1.2 C2.2 C3.2 C4.1 C6.2 C7.2 C8.2 C9.2 C11.1 C12.2 C14.1 C15.1 C16.1 C18.1 C19.1 C20.1 C21.1 C22.2 C23.2 C25.1 C28.2 C29.1 C30.1 D1.13 D1.19 D1.21 D1.27 D1.30 D1.31 D1.33 D1.36 D1.37 D1.45 D1.63 D1.66 D1.67 D1.69 D1.70 D1.71 D1.72 D1.73 D1.74 D1.75 D1.76 D1.77 DA1.2 DA2.3 DA2.6 DA2.9 DA3.5 DA3.8 DA3.9 DD1.8 DD1.23 DD1.35 DD1.47 DD2.5 DD2.10 DD2.12 DD2.13 DD2.16 DS1.4 R4.2 R5.2 R7.2 R8.1 R10.1 R11.2 R19.2 TP5.1 VD2.A VD3.C VD5.2 VT1.2 WA1.2 X1.4 X1.8 ZQ2.2 | length 69
  Top Layer w0.15: 43.075,3.05 43.025,3.1 43.025,4.211 43.157,4.343 ; DD2.5 53.525,13.375 53.875,13.025
  Top Layer w0.25: DS1.4 51.475,9.534 51.85,9.159 v1(51.85,8.925)
  Top Layer w0.5: 13.95,17 14.925,17 14.95,17.025 v2@16.075,17.025 ; 14.075,19.35 C9.2 ; 14.325,18.2 14.975,18.2 ; C8.2@14.975,17.425 14.975,18.2 ; v2@15.725,18.2 14.975,18.2 ; v2@16.1,19.35 C9.2 ; 29.125,19.525 29.15,19.55 C14.1 ; 29.475,9.475 29.8,9.8 C16.1 30.331,10.075 30.806,10.55 D1.27 ; v3(34.4,18.775) 35.075,18.775 D1.21 ; v3@36.865,17.975 37.3,18.41 D1.19 ; D1.74 D1.77 ; 37.125,2.7 36.7,3.125 D1.63 36.7,6.5 D1.75 ; D1.69@41.885,6.6 D1.76 ; D1.69 D1.70 ; v1(47.9,17.475) 47.925,17.45 C11.1 ; 49.45,16.7 C11.1 ; DA1.2 50.1,18.1 C11.1 ; 14.975,18.2 C9.2 ; D1.75 D1.73 D1.72 ; D1.75 D1.76 ; D1.76 D1.77 ; D1.77 D1.70 ; D1.77 D1.72 ; D1.72 D1.71 D1.70
  Bottom Layer w0.5: 5.249,13.425 VD2.A ; 6.7,14.65 VD2.A ; 8.6,13.425 VD2.A ; v1@13.25,18.725 C7.2 C7.2@13.45,19.75 ; 14.175,19.025 C7.2@13.45,19.75 ; 14.9,19.75 C7.2@13.45,19.75
  other v1: 32.35,0.9 33.35,0.9 46.775,1.4 47.9,1.4 48.6,1.4 49.3,1.4 50,1.4 50.7,1.425 51.4,1.575 44.7,1.8 52.025,1.875 32.35,2.3 33.35,2.3 52.575,2.3 40.9,2.475 43.55,2.65 53.075,2.775 46.675,2.8 47.375,2.8 48.075,2.8 48.775,2.8 49.475,2.8 50.175,2.8 45.975,2.825 50.875,2.875 45.325,3.1 51.5,3.2 53.575,3.275 52,3.7 54.075,3.775 52.5,4.2 54.575,4.275 53,4.7 55.075,4.775 53.5,5.2 55.575,5.275 54,5.7 56.075,5.775 54.5,6.2 56.575,6.275 57.775,6.65 55,6.7 57.075,6.775 58.475,6.775 59.05,7.175 55.5,7.2 56,7.7 59.425,7.775 48.575,7.8 55.95,8.4 59.55,8.475 56.05,9.1 59.4,9.175 56.425,9.7 59,9.75 57,10.1 58.4,10.15 57.7,10.25 54.525,12.325 8.2,13 8.9,13 8.2,13.7 8.9,13.7 48.6,17.475 12.6,18.7 13.3,18.7 29.15,19.075 45.3,19.6
  other v2: 52.5,1 54,1 55.5,1 57,1 58.5,1 60,1 61.5,1 63,1 64.5,1 66,1 54,2.5 57,2.5 60,2.5 63,2.5 66,2.5 49.5,4 51,4 55.5,4 58.5,4 61.5,4 64.5,4 66,4 51,5.5 52.5,5.5 57,5.5 60,5.5 63,5.5 66,5.5 25.8,6.1 25.8,7 53.5,7 61.5,7 64.5,7 66,7 25.8,7.9 60.5,8.5 63,8.5 66,8.5 25.8,8.8 25.8,9.7 61.5,10 64.5,10 66,10 25.8,10.6 60,11.5 63,11.5 66,11.5 1,11.8 2.2,11.8 3.3,11.8 18.2,11.8 18.2,12.7 58.5,13 61.5,13 64.5,13 66,13 66,14.5 54.5,15 56,15 52,15.5 53.5,15.5 64.5,16 66,16 3.3,16.5 16,17 55.5,17.5 58.5,17.5 66,17.5 16,18.1 66,19 16,19.1
  other v3: 46.225,1.5 47.35,1.5 45.75,1.55 45.275,1.65 37.975,2.2 38.825,2.2 40.05,2.3 39.275,2.425 38.4,2.475 38.85,2.7 37.975,2.75 44.9,3.525 32.625,4.525 32.85,5.025 32.65,5.55 26.6,5.85 27.1,5.85 27.6,5.85 28.1,5.85 28.6,5.85 29.1,5.85 29.6,5.85 30.1,5.85 30.6,5.85 43.9,13.375 37.725,15.35 38.225,15.35 36.825,17.975
  other v4: 22.35,16.1 24,16.1 7.85,16.675 9.15,16.675 23.175,16.7 22.35,17.175 24,17.175 8.5,17.675 7.85,18.675 9.15,18.675
GPS_ANT: D1.68 WA2.1 | length 17.2
  Top Layer w0.305: D1.68 43.7,3.6 v1(44.45,2.85)
  MID1 w0.28: v1(44.45,2.85) 44.456,2.844 ccw(c46.252,4.64) 46.252,2.1 50.348,2.1 ccw(c50.348,4.64) 52.144,2.844 WA2.1
GPS_BKP: C25.2 D1.28 R14.2 VD4.C | length 40.7
  Top Layer w0.2: D1.28 32.475,9.45 32.7,9.675 32.7,11.077 v3(32.652,11.126) ; v3(58.575,15.75) R14.2 60,16.2 VD4.C
  Top Layer w0.5: C25.2 30.625,9.45 D1.28
  MID2 w0.2: v3(49.3,13.325) 56.15,13.325 v3(58.575,15.75)
  MID1 w0.2: v3(32.652,11.126) 32.575,11.202 32.575,14.578 32.947,14.95 33.403,14.95 36.053,12.3 43.675,12.3 45.225,13.85 48.775,13.85 v3(49.3,13.325)
GPS_EN: D1.59 DD1.14 | length 16
  Top Layer w0.2: v3(33.25,13.55) D1.59
  MID1 w0.2: v3(33.25,13.55) 34.9,11.9 v3(46.175,11.9)
  Bottom Layer w0.2: v3(46.175,11.9) 46.525,12.25 DD1.14
GPS_RX: D1.62 DD1.21 | length 16.6
  Top Layer w0.2: v3(33.275,10.025) 33.95,9.35 D1.62
  MID1 w0.2: v3(33.275,10.025) 33.328,10.025 34.103,10.8 44.5,10.8 v3(46.4,8.9)
  Bottom Layer w0.2: v3(46.4,8.9) 46.55,8.75 DD1.21
GPS_TX: D1.61 DD1.22 | length 18.7
  Top Layer w0.2: v3(33.275,10.75) D1.61
  MID1 w0.2: v3(33.275,10.75) 33.222,10.75 32.725,10.253 32.725,9.797 33.047,9.475 34.083,9.475 35.008,10.4 43.8,10.4 v3(46.4,7.8)
  Bottom Layer w0.2: v3(46.4,7.8) 46.85,8.25 DD1.22
GSM_ANT: D1.32 WA1.1 | length 3.9
  Top Layer w0.5: WA1.1 28.85,5.05 D1.32
GSM_PWR: DA3.2 DD1.46 R8.2 | length 18.8
  Top Layer w0.2: DA3.2 23.81,19.233 26.268,16.775 R8.2 28.25,16.775 30.625,14.4 v3(33.175,14.4)
  Bottom Layer w0.2: v3(33.175,14.4) 33.75,13.825 33.75,13.45 35.45,11.75 DD1.46
GSM_RX: D1.2 DD1.12 | length 10.9
  Top Layer w0.2: 45.65,5.825 45.65,12.082 46.3,12.732 46.3,13.225 v3(46.375,13.3) ; 45.675,5.8 46.425,5.05 D1.2
  Bottom Layer w0.2: DD1.12 46.025,13.65 v3(46.375,13.3)
GSM_TX: D1.1 DD1.13 | length 13.9
  Top Layer w0.2: v3(46.4,6.7) 46.3,6.6 46.3,5.922 46.622,5.6 48.078,5.6 48.4,5.278 48.4,4.55 47.8,3.95 D1.1
  Bottom Layer w0.2: v3@46.4,6.725 45.9,7.225 45.9,9.225 46.175,9.5 46.357,9.5 46.65,9.793 46.65,10.35 46.4,10.6 46.193,10.6 45.675,11.118 45.675,12.107 46.318,12.75 DD1.13
LED_MCU: DD1.28 R13.1 | length 1.6
  Bottom Layer w0.2: R13.1@44.525,4.15 DD1.28
MISO: DD1.16 DD2.7 DS1.2 R17.1 | length 11.3
  Top Layer w0.2: v3(46.4,11.1) 48.1,11.1 48.3,10.9 50,10.9 50.475,10.425 50.875,10.825 51.575,10.825 ; R17.1 52.65,9.75 51.575,10.825 ; DD2.7 52.75,12.35 52.325,11.925 52.325,11.575 51.575,10.825
  Bottom Layer w0.2: v3(46.4,11.1) 46.55,11.25 DD1.16
MOSI: DD1.17 DD2.6 DS1.5 R16.1 | length 10.2
  Top Layer w0.2: R16.1 48.4,13.55 48.4,12.522 48.214,12.336 48.214,12.064 48.525,11.753 v3(48.525,11.4) 48.707,11.4 49.172,11.865 50.91,11.865 51.325,12.28 51.325,12.3 51.475,12.45 DS1.5 53.185,12.865 DD2.6
  Bottom Layer w0.2: DD1.17 48.225,10.75 48.525,11.05 v3(48.525,11.4)
NetC5_1: C5.1 DA2.8 L1.1 VD2.C | length 5.6
  Bottom Layer w0.3: C5.1 4.5,12.35 9.575,12.35 9.925,12.7
NetC5_2: C5.2 DA2.1 | length 2.3
  Bottom Layer w0.3: C5.2 5.7,15.2 DA2.1
NetC10_2: C10.2 DA3.7 R3.1 R4.1 | length 5.4
  Top Layer w0.2: DA3.7 23.81,13.19 24.25,12.75 26.275,12.75 26.275,13.725 R4.1@26.275,14.75
NetC13_2: C13.2 DA2.4 R2.1 R5.1 | length 3.4
  Bottom Layer w0.2: R5.1 R2.1 C13.2 5.695,19.575 DA2.4
NetC22_1: C22.1 DD1.3 ZQ1.1 | length 6.1
  Bottom Layer w0.2: C22.1 39.25,17.4 ZQ1.1 39.475,16.9 40.525,15.85 41.182,15.85 41.525,15.507 DD1.3
NetC23_1: C23.1 DD1.4 ZQ1.2 | length 4.8
  Bottom Layer w0.2: DD1.4 42.025,17.125 ZQ1.2 42.2,17.4 C23.1
NetC28_1: C28.1 R14.1 | length 1.1
  Top Layer w0.3: R14.1 60.575,14.875 C28.1@61.475,14.875
NetDD1_5: DD1.5 ZQ2.1 | length 2.9
  Bottom Layer w0.2: DD1.5 42.525,15.7 43.55,16.725 43.575,16.725
NetDD1_6: DD1.6 ZQ2.3 | length 5.3
  Bottom Layer w0.2: DD1.6 43.025,15.4 43.925,16.3 44.757,16.3 44.932,16.125 45.975,16.125 46.525,16.675
NetR13_2: R13.2 VD3.A | length 1.4
  Bottom Layer w0.2: R13.2 45.95,3.975 VD3.A
  Bottom Layer w0.25: R13.2@45.525,4.05 R13.2@45.525,4.15
NRST: DD1.7 R12.2 | length 9.5
  Top Layer w0.2: v3(44.55,15.8) 45.451,15.8 46.251,16.6 48.078,16.6 48.878,15.8 50.4,15.8 R12.2
  Bottom Layer w0.2: DD1.7 43.525,15.1 44.225,15.8 v3(44.55,15.8)
PWRKEY: D1.39 DD1.32 | length 5.7
  Top Layer w0.15: D1.39 40.6,1.342 41.575,2.317 41.575,4.35 41.875,4.65 v3(42.525,4.65)
  Bottom Layer w0.15: v3(42.525,4.65) DD1.32
SCK: DD1.15 DD2.4 DS1.6 R15.1 | length 9.1
  Top Layer w0.2: v3@48.815,12.215 50.765,12.215 50.975,12.425 DS1.6 R15.1 50.975,14.25 53.875,14.25 54.025,14.1 DD2.4
  Bottom Layer w0.2: DD1.15 48.168,11.75 48.618,12.2 v3(48.8,12.2)
SIM_CLK: D1.16 D3.6 X1.3 | length 16.5
  Top Layer w0.2: v3(30.05,16.075) 30.95,16.975 34.621,16.975 34.746,17.1 39.573,17.1 40.6,18.127 D1.16
  Bottom Layer w0.2: X1.3 28.16,18.39 29.415,17.135 D3.6 29.415,16.71 v3(30.05,16.075)
SIM_GND: D3.1 VT1.3 X1.5 | length 6.7
  Bottom Layer w0.4: D3.1 31.955,9.005 X1.5
  Bottom Layer w0.5: X1.5 33.8,7.16 VT1.3
SIM_IO: D1.15 D3.3 R1.2 X1.7 | length 27.6
  Top Layer w0.2: R1.2 31.725,17.475 v3(34.4,17.475) 39.453,17.475 40.05,18.072 40.05,19.528 40.372,19.85 41.175,19.85 41.7,19.325 D1.15
  Bottom Layer w0.2: X1.7 28.16,9.56 29.415,10.815 D3.3 29.415,11.29 30.15,12.025 32.375,12.025 32.575,12.225 32.575,15.575 32.595,15.575 34.4,17.38 v3(34.4,17.475)
SIM_ON: DD1.38 R11.1 VT1.1 | length 7.6
  Bottom Layer w0.2: VT1.1 34.75,4.3 35.525,5.075 R11.1 36.575,6.025 38.3,7.75 DD1.38
SIM_RST: C15.2 D1.17 D3.7 X1.2 | length 15.1
  Top Layer w0.2: C15.2 30.15,17.675 v3(30.7,17.675) ; v3(39,19.7) 39.5,19.2 D1.17
  Bottom Layer w0.2: X1.2 30.685,19.655 D3.7 30.685,16.64 31.163,16.163 32.337,16.163 34.35,18.175 34.5,18.175 35.074,18.175 36.599,19.7 v3(39,19.7)
SIM_VDD: C14.2 D1.18 D3.8 R1.1 X1.1 | length 14.5
  Top Layer w0.2: R1.1 29.775,18.55 C14.2
  Top Layer w0.4: v1(32.275,19.55) 32.7,19.975 37.8,19.975 38.4,19.375 D1.18
  Top Layer w0.5: C14.2 v1(32.275,19.55)
  Bottom Layer w0.2: D3.8 31.955,17.13 33.24,18.415 X1.1
  Bottom Layer w0.4: v1(32.275,19.55) 33.12,19.55 X1.1
SWCLK: DD1.37 TP3.1 | length 8.6
  MID1 w0.2: v3(39.025,4.65) 39.75,4.65 v3(42.175,2.225)
  Bottom Layer w0.2: v3(39.025,4.65) DD1.37 ; TP3.1 42.175,1.625 v3(42.175,2.225)
SWDIO: DD1.34 TP4.1 | length 5.7
  Bottom Layer w0.2: DD1.34 41.525,4.841 42.675,3.691 42.675,1.375 TP4.1
U_IN1: pad.0@1.6,14.8 VD1.1 VD5.4 | length 5.6
  Top Layer w1: pad.0@1.6,14.8 VD1.1@4.25,14.8 ; VD1.1 5.35,15.6 VD5.4
U_IN2: pad.0@1.6,18.8 VD1.2 VD5.3 | length 5.5
  Top Layer w1: pad.0@1.6,18.8 VD1.2@4.25,18.8 ; VD1.2 5.05,19.6 VD5.3
U_MAIN: C6.1 C7.1 DA2.5 DA2.7 R6.1 VD5.1 | length 23.5
  Top Layer w0.2: v3(27.1,9.525) 27.15,9.525 R6.1
  MID1 w0.2: v3(10.45,19.1) 10.775,19.1 v2(14.15,15.725)
  Bottom Layer w0.2: v3(10.45,19.1) 10.93,19.58 DA2.5 ; 14.475,15.05 14.525,15.1 15.075,15.1 15.45,15.475 16.379,15.475 18.479,13.375 23.115,13.375 23.525,12.965 23.525,11.775 23.875,11.425 26.08,11.425 27.1,10.405 v3(27.1,9.525)
  other v1: 12.65,14.75 13.35,14.75 14.05,14.925
U_MAIN_MEAS: C16.2 DD1.18 R6.2 R7.1 | length 23.2
  Top Layer w0.2: R6.2 R7.1 C16.2 29.8,11.078 30.922,12.2 32.55,12.2 v3(33.25,11.5)
  MID1 w0.2: v3(33.25,11.5) 33.425,11.325 45.397,11.325 46.172,10.55 48.35,10.55 v3(48.55,10.35)
  Bottom Layer w0.2: DD1.18 48.45,10.25 v3(48.55,10.35)
UART1_RX: DD1.31
UART1_TX: DD1.30 TP7.1 | length 1.6
  Bottom Layer w0.2: TP7.1 DD1.30
pads on no net: D1.3 D1.4 D1.5 D1.6 D1.7 D1.8 D1.9 D1.10 D1.11 D1.12 D1.14 D1.20 D1.22 D1.23 D1.24 D1.25 D1.26 D1.29 D1.38 D1.40 D1.41 D1.42 D1.43 D1.44 D1.46 D1.47 D1.48 D1.49 D1.50 D1.51 D1.52 D1.53 D1.54 D1.55 D1.56 D1.57 D1.58 D1.60 D1.64 D1.65 D3.2 D3.4 D3.5 D3.9 DA1.4 DA2.2 DA3.1 DD1.2 DD1.11 DD1.26 DD1.27 DD1.29 DD1.33 DD1.39 DD1.40 DD1.41 DD1.42 DD1.43 DD1.45 DD2.2 DD2.3 DD2.9 DS1.9 X1.6 X1.MH1 X1.MH2

## Polygon pours and split planes (outlines as drawn)
GND on MID1 "GND_MID1" (solid, remove dead copper, pour order 8): 0,0.5 0,20 cw(c0.5,20) 0.5,20.5 66.5,20.5 cw(c66.5,20) 67,20 67,0.5 cw(c66.5,0.5) 66.5,0 0.5,0 cw(c0.5,0.5)
3V3MCU on MID1 "3V3MCU" (solid, remove dead copper, pour order 4): 59.5,20.5 40.5,20.5 40,20 40,15.5 40,4.5 40.5,4 42,4 43,5 47.5,5 51.5,5 59.5,13
4V0 on MID1 "4V0" (solid, remove dead copper, pour order 0): 36.7,2.1 36.3,1.7 35.5,1.7 34,3.2 34,5.6 32.6,7 31.5,7 30.3,7 26,11.3 21.6,11.3 21.4,11.5 21.4,12 21.4,13 21.925,13.525 28.375,13.525 28.7,13.2 32.8,9.1 35.4,9.1 36.7,7.8
4V5 on MID1 "4V5toMCU" (solid, remove dead copper, pour order 2): 18.4,16.6 18.4,19.625 18.262,19.763 18.262,20.5 19.6,20.5 48,20.5 49,19.5 49,18 46.9,15.9 44.9,15.9 19.1,15.9
GND on Top Layer "GND_TOP" (solid, remove dead copper, pour order 6): 0,0.5 0,20 cw(c0.5,20) 0.5,20.5 66.5,20.5 cw(c66.5,20) 67,20 67,0.5 cw(c66.5,0.5) 66.5,0 0.5,0 cw(c0.5,0.5)
GND on MID2 "GND_MID2" (solid, remove dead copper, pour order 10): 0,0.5 0,20 cw(c0.5,20) 0.5,20.5 66.5,20.5 cw(c66.5,20) 67,20 67,0.5 cw(c66.5,0.5) 66.5,0 0.5,0 cw(c0.5,0.5)
GND on Bottom Layer "GND_BOT" (solid, remove dead copper, pour order 12): 0,0.5 0,20 cw(c0.5,20) 0.5,20.5 66.5,20.5 cw(c66.5,20) 67,20 67,0.5 cw(c66.5,0.5) 66.5,0 0.5,0 cw(c0.5,0.5)

## Keep-outs
Keep-Out Layer:
  the board outline again, w0.1

## Other copper
Top Layer:
  region net GND: 38.525,0.4 38.95,0.825 38.95,1.75 39.075,1.875 38.6,2.325 37.25,2.325 37.025,2.1 37,2.1 37,0.575 37.175,0.4
  region net GND: 43.15,4.214 43.139,4.214 43.1,4.175 43.1,3.236 43.15,3.186 42.95,2.986 42.95,2.95 42.425,2.95 42.425,3.925 42.755,4.255 42.95,4.255
  region net 3V3MCU: 53.025,19.875 52.9,19.75 52.9,18.375 53.025,18.25 56.975,18.25 57.075,18.15 57.575,18.15 57.7,18.275 58.9,18.275 59.525,18.9 59.525,19.375 59.525,19.55 59.4,19.675 59.2,19.875
  region net 4V5: 17.625,16.125 17.475,16.275 17.475,20.075 17.65,20.25 22.675,20.25 22.85,20.075 22.85,18.925 22.1,18.175 20.825,18.175 19.825,17.175 19.825,16.275 19.675,16.125
  pour cut-out: 30.85,0 30.85,5.6 25.35,5.6 25.35,11.3 0,11.3 0,0
  region net 4V0: 19.65,11.925 19.65,11.675 20,11.325 23.025,11.325 23.275,11.575 23.275,14.5 23.1,14.675 22.05,14.675 21.875,14.5 21.875,13.25 21.625,13 20.85,13 20.75,13.1 20.5,13.35 19.925,13.35 19.65,13.05
  region net 4V0: 34.95,0.4 34.8,0.55 34.8,3.675 35.025,3.9 35.875,3.9 36.1,3.675 36.1,2.925 36.275,2.75 36.475,2.75 36.65,2.575 36.65,0.625 36.425,0.4
  region net U_MAIN: 12.225,16.175 12.075,16.025 12.075,12.975 12.475,12.575 13.2,12.575 14.6,13.975 14.6,15.925 14.35,16.175
  region net 4V5: 47.675,19.7 47.925,19.95 51.55,19.95 51.875,19.625 51.875,18.725 51.725,18.575 49.2,18.575 48.775,18.15 47.925,18.15 47.675,18.4
  region net GND: 30.85,3.95 32.775,3.95 32.775,6.15 30.65,6.15 30.65,5.6 30.85,5.6 30.85,5.475 cw(c31.593,1.83) 31.6,5.55 cw(c31.594,1.954) 32.325,5.475 cw(c32.273,5.007) 32.65,4.725 32.325,4.625 cw(c31.686,7.26) 31.6,4.55 cw(c31.501,7.352) 30.85,4.625
MID2:
  pour cut-out: 25.35,0 25.35,5.3 25.35,11.3 0,11.3 0,0
MID1:
  pour cut-out: 25.35,0 25.35,5.3 25.35,11.3 0,11.3 0,0
Bottom Layer:
  pour cut-out: 27.65,20.225 27.65,17.725 28.675,17.725 28.675,20.225
  pour cut-out: 30.185,20.225 30.185,17.725 31.21,17.725 31.21,20.225
  pour cut-out: 32.725,20.225 32.725,17.725 33.75,17.725 33.75,20.225
  pour cut-out: 27.645,9.665 27.645,7.165 28.67,7.165 28.67,9.665
  pour cut-out: 32.73,9.66 32.73,7.16 33.755,7.16 33.755,9.66
  pour cut-out: 30.185,9.665 30.185,7.165 31.21,7.165 31.21,9.665
  pour cut-out: 25.35,0 25.35,11.3 0,11.3 0,0
  region net U_MAIN: 14.025,14.4 14.625,15 14.625,16.6 13.6,17.625 10.75,17.625 10.5,17.375 10.5,16.625 10.75,16.375 12.175,16.375 12.3,16.25 12.3,14.6 12.5,14.4
  region net NetC5_1: 10.575,16.075 9.85,15.35 9.85,12.825 10.975,11.7 15.875,11.7 16.625,12.45 16.35,14.125 12.3,14.125 12.075,14.35 12.075,15.9 11.9,16.075
  region net 4V5: 18.4,16.85 18.75,16.5 20.925,16.5 21.5,17.075 21.5,18.75 21,20.25 19.625,20.25 19.2,19.825 18.4,19.025
  region net 4V0: 35.3,0.475 35.525,0.25 37.4,0.25 37.575,0.425 37.575,4.175 37.425,4.325 35.775,4.325 35.375,3.925 35.375,2.375 35.3,2.3
  region net GND: 40.425,0.25 40.575,0.4 40.575,4.175 40.4,4.35 40.325,4.35 40.25,4.425 40.25,4.725 39.575,4.725 39.425,4.575 39.425,4.5 cw(c38.812,4.888) 39.2,4.275 39.225,4.25 39.225,0.25

## Silkscreen, mask and mechanical layers (free items; w line width, h text height)
Top Overlay:
  lines w0.2: 59.3,17.85 60.7,17.85
  text "P00160.5_868_P" at 53,1 h1
Bottom Overlay:
  lines w0.2: 9.55,11.975 9.55,14.875

## Text inside footprints (layer, text, board x,y; h text height)
D1: Mechanical 1 "KeepOut" at 33.375,7.025 h0.8 r270
VD1: Mechanical 1 "+" at 6.55,19.5 h1 r90
VD2: Mechanical 1 "+" at 6.15,11.275 h1
VD3: Mechanical 1 "+" at 46.7,3.1 h1; Bottom Overlay "+" at 46.675,2.8 h1
VD4: Mechanical 1 "+" at 61.025,19.85 h1 r90
VD5: Mechanical 1 "+" at 11.75,16.225 h1 r180; Mechanical 1 "-" at 11.75,19.975 h1 r180; Mechanical 1 "~" at 8.725,16.45 h1 r180; Mechanical 1 "~" at 8.725,20.45 h1 r180